# Altium PCB Robotronik-carto.PcbDoc
Units mil, origin at the board's own origin, x right, y up, seen from the top; angles counter-clockwise.
Board outline 2370 x 1320 mil, 2 copper layers (Top Layer, Bottom Layer); 15 components, 12 nets, 59 pads, 0 vias.
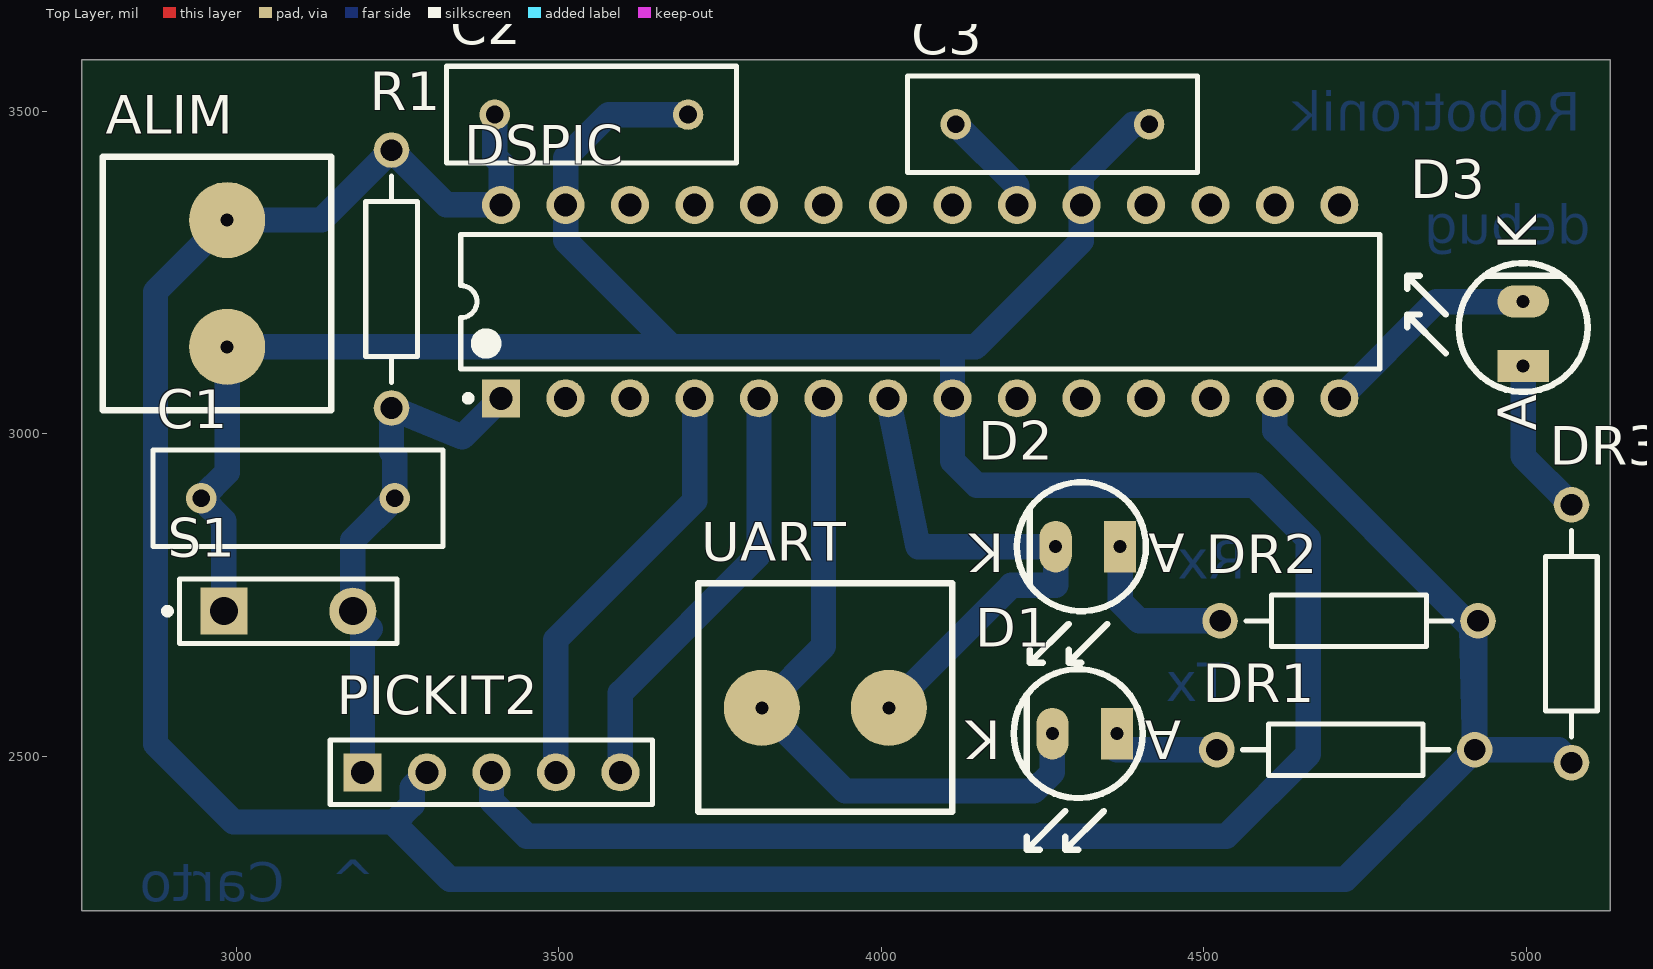
[diagram p0: Top Layer view]
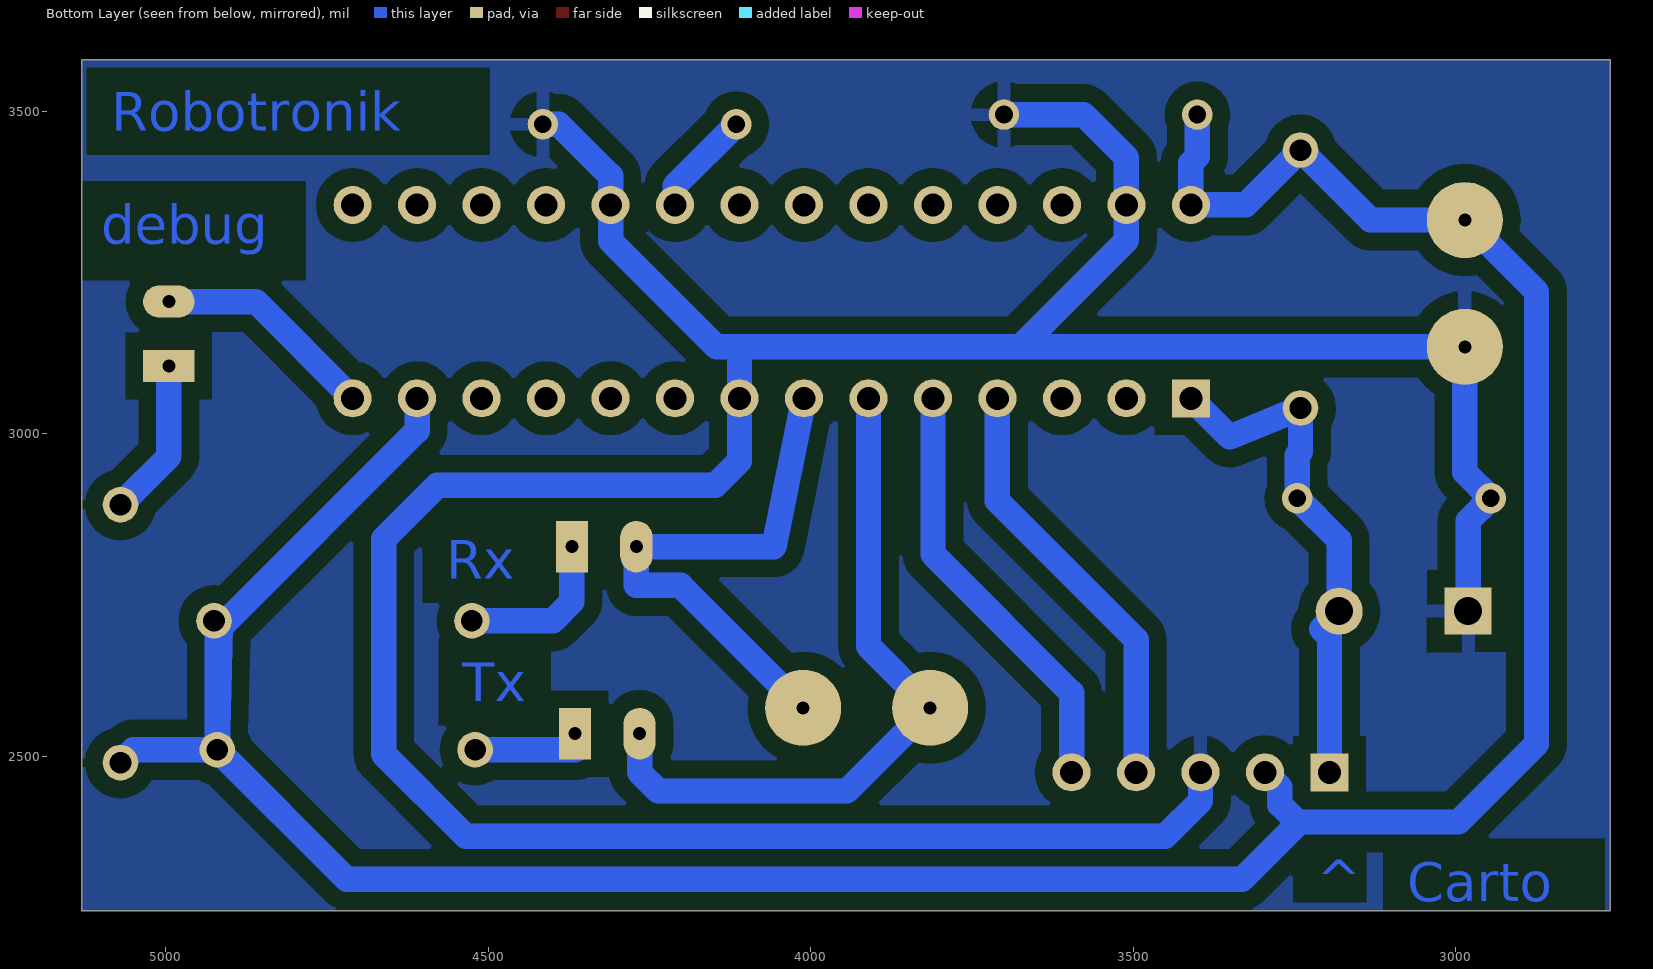
[diagram p1: Bottom Layer view, seen from below]

## Layer stack, top to bottom
Top Layer: signal copper 1.4
Dielectric: dielectric 12.6, FR-4, Dk 4.8
Bottom Layer: signal copper 1.4

## Board outline
2760.28,3580 2760.28,2260 5130.28,2260 5130.28,3580

## Design rules (kind name [scope] priority, off if disabled: settings)
Clearance [All] p1: gap=27.56
PolygonConnect [All] p1: connectstyle=Relief reliefconductorwidth=20 reliefentries=4 polygonreliefangle="90 Angle"
RoutingLayers [All] p1: top layer_v5=FALSE bottom layer_v5=TRUE
RoutingVias [All] p1: holewidth=20 width=60 viastyle="Through Hole" minholewidth=20 minwidth=60 maxholewidth=20 maxwidth=60
SilkscreenOverComponentPads [All] p1: minsilkscreentomaskgap=10
SolderMaskExpansion [All] p1: expansion=4
Width [All] p1: maxlimit=39.37 minlimit=20 preferedwidth=39.37
26 further rules are at their usual default settings.

## Components (designator, comment, footprint, x,y, rotation, side; value= is the part's Value field where it differs from the comment)
ALIM "Bornier_2" Bornier_2 2985.28,3430 r270 top
C1 "Cap" RAD-0.3 3095.28,2900 r0 top
C2 "Cap" RAD-0.3 3550.28,3495 r180 top
C3 "Cap" RAD-0.3 4265.28,3480 r180 top
D1 "Led Verte" LED 4365.28,2535 r180 top
D2 "Led Orange" LED 4370.28,2825 r180 top
D3 "Led Rouge" LED 4995.28,3105 r90 top
DR1 "Res2" AXIAL-0.4 4720.28,2510 r0 top
DR2 "Res2" AXIAL-0.4 4725.28,2710 r0 top
DR3 "Res2" AXIAL-0.4 5070.28,2690 r270 top
DSPIC "DSPIC33FJ128MC802-I/SP" SPDIP300-SP28 4060.28,3205 r90 top
PICKIT2 "Header 5H" HDR1X5 3195.28,2475 r0 top
R1 "Res2" AXIAL-0.4 3240.28,3240 r90 top
S1 "SW-SPST" SPST-2 3080.28,2725 r0 top
UART "UART" Bornier_2 4110,2575 r180 top

## Footprints (in the part's own frame and the unit in brackets; to place one, negate y for a bottom-side part, rotate by r counter-clockwise, add the part's x,y. Pads: shape width x height; smd on the part's side, far side on the other; paste and mask are expansions set on the pad)
AXIAL-0.4 [mm] "Axial Device, Thru-Hole; 2 Leads; 0.4 in Pin Spacing"
  round 1.4 hole 0.85: 1(-5.08,0) 2(5.08,0)
  silkscreen extent -4.06,-1.02 4.06,1.02
Bornier_2 [mm]
  round 3 hole 0.508: 1(2.5,0) 2(7.5,0)
  silkscreen extent 0,-4.9 10,4.1
HDR1X5 [mm] "Connector; Header; 5 Position"
  rect 1.5x1.5 hole 0.9: 1(0,0)
  round 1.5 hole 0.9: 2(2.54,0) 3(5.08,0) 4(7.62,0) 5(10.16,0)
  silkscreen extent -1.27,-1.27 11.43,1.27
LED [mil]
  rect 50x80 hole 20: 1(0,0)
  oval 50x80 hole 20: 2(100,0)
  silkscreen extent -40,-100 160,180
RAD-0.3 [mm] "Radial Cap, Thru-Hole; 2 Leads; 0.3 in Pin Spacing"
  round 1.2 hole 0.7: 1(-3.81,0) 2(3.81,0)
  silkscreen extent -5.71,-1.91 5.71,1.91
SPDIP300-SP28 [mm] "DIP, 28-Leads, Row Spacing 7.62mm, Pitch 2.54mm, Body 34.9x6.8mm"
  rect 1.5x1.5 hole 0.9: 1(-3.81,16.51)
  round 1.5 hole 0.9: 2(-3.81,13.97) 3(-3.81,11.43) 4(-3.81,8.89) 5(-3.81,6.35) 6(-3.81,3.81) 7(-3.81,1.27) 8(-3.81,-1.27) 9(-3.81,-3.81) 10(-3.81,-6.35) 11(-3.81,-8.89) 12(-3.81,-11.43) 13(-3.81,-13.97) 14(-3.81,-16.51) 15(3.81,-16.51) 16(3.81,-13.97) 17(3.81,-11.43) 18(3.81,-8.89) 19(3.81,-6.35) 20(3.81,-3.81) 21(3.81,-1.27) 22(3.81,1.27) 23(3.81,3.81) 24(3.81,6.35) 25(3.81,8.89) 26(3.81,11.43) 27(3.81,13.97) 28(3.81,16.51)
  silkscreen extent -3.93,-18.1 2.65,18.1, body extent -3.55,-18.1 3.55,18.1, height 5.08
SPST-2 [mm] "Switch; 2 Leads"
  rect 1.85x1.85 hole 1.1: 1(-2.54,0)
  round 1.85 hole 1.1: 2(2.54,0)
  silkscreen extent -4.89,-1.27 4.28,1.27

## Part data
ALIM: "Header, 2-Pin"
C1 C2 C3: "Capacitor"
D1 D2 D3: library part Led, "LED"
DR1 DR2 DR3 R1: "Resistor"
DSPIC: "High-Performance 16-bit Digital Signal Controller, 128 KB Flash, 16 KB RAM, 28-Pin SPDIP, Industrial Temperature"
PICKIT2: "Header, 5-Pin, Right Angle"
S1: "Single-Pole, Single-Throw Switch"
UART: library part Bornier_2, "Header, 2-Pin"

## Nets (pads, with @x,y where several pads share a name; then routed paths per layer and width w, separated by ;. In a path a pad name is that pad's centre, name@x,y a point inside that pad or via, vN(x,y) a via of type N, cw(c..) or ccw(c..) an arc to the next point about the centre after c; other vN are vias at no path point)
DEBUG: D3.2 DSPIC.14 | length 347.1
  Bottom Layer w39.37: DSPIC.14 4860.28,3205 D3.2
GND: ALIM.2 C1.1 C2.1 C3.1 DSPIC.8 DSPIC.19 DSPIC.27 PICKIT2.3 S1.1 | length 5151.6
  Bottom Layer w39.37: S1.1 2980.28,2865 C1.1 2985.28,2940 ALIM.2 3675.55,3134.72 ; PICKIT2.3 3395.28,2430.72 3450,2376 4535,2376 4662,2503 4662,2837 4579,2920 4148,2920 4110.28,2957.72 DSPIC.8 4110.28,3134.72 ; C2.1 3577,3495 3510.28,3428.28 DSPIC.27 3510.28,3300 3675.55,3134.72 ; C3.1 4390.28,3480 4310.28,3400 DSPIC.19 4310.28,3299 4146,3134.72 4110.28,3134.72 ; 3675.55,3134.72 4110.28,3134.72
NetC1_2: C1.2 DSPIC.1 PICKIT2.1 R1.1 S1.2 | length 814.3
  Bottom Layer w39.37: PICKIT2.1 3195.28,2685 3207.78,2697.5 S1.2 3180.28,2835 C1.2 3245.28,2967 3240.28,2972 R1.1 3350.28,2995 DSPIC.1
NetC3_2: C3.2 DSPIC.20 | length 164.4
  Bottom Layer w39.37: C3.2 4210.28,3385 DSPIC.20
NetD1_1: D1.1 DR1.1 | length 180
  Bottom Layer w39.37: D1.1 4365.28,2510 DR1.1
NetD2_1: D2.1 DR2.1 | length 252.6
  Bottom Layer w39.37: D2.1 4370.28,2739.72 4400,2710 DR2.1
NetD3_1: D3.1 DR3.1 | length 246.1
  Bottom Layer w39.37: D3.1 4995.28,2965 DR3.1
PGC: DSPIC.5 PICKIT2.5 | length 669.1
  Bottom Layer w39.37: PICKIT2.5 3595.28,2598.28 3810.28,2813.28 DSPIC.5
PGD: DSPIC.4 PICKIT2.4 | length 669.1
  Bottom Layer w39.37: PICKIT2.4 3495.28,2680.75 3710.28,2895.75 DSPIC.4
UART_RX: D2.2 DSPIC.7 UART.1 | length 845.5
  Bottom Layer w39.37: DSPIC.7 4056.83,2825 D2.2 4270.28,2765 4201.57,2765 UART.1
UART_TX: D1.2 DSPIC.6 UART.2 | length 1095.6
  Bottom Layer w39.37: DSPIC.6 3910.28,2670.55 UART.2 3943.72,2446 4236.28,2446 4265.28,2475 D1.2
VDD: ALIM.1 C2.2 DR1.2 DR2.2 DR3.2 DSPIC.13 DSPIC.28 PICKIT2.2 R1.2 | length 4856.7
  Bottom Layer w39.37: 3245,2395 3331,2309 4719.28,2309 DR1.2 ; PICKIT2.2 3272.28,2452 3272.28,2425 3245.28,2398 2995.28,2398 2874.28,2519 2874.28,3220.57 ALIM.1 3131.85,3331.57 R1.2 3325.28,3355 DSPIC.28 3410.28,3420 3400.28,3430 C2.2 ; DSPIC.13 4610.28,3005 DR2.2@4915.28,2700 ; DR2.2 DR2.2@4915.28,2700 ; DR3.2 5050.28,2510 DR1.2 ; DR2.2@4915.28,2700 4920.28,2695 DR1.2 ; DR2.2@4915.28,2700 DR1.2
pads on no net: DSPIC.2 DSPIC.3 DSPIC.9 DSPIC.10 DSPIC.11 DSPIC.12 DSPIC.15 DSPIC.16 DSPIC.17 DSPIC.18 DSPIC.21 DSPIC.22 DSPIC.23 DSPIC.24 DSPIC.25 DSPIC.26

## Polygon pours and split planes (outlines as drawn)
GND on Bottom Layer "Bottom Layer-No Net" (solid, pour order 6): 2760,3580 5130,3580 5130,2260 2760,2260

## Other copper
Bottom Layer:
  text "Robotronik" at 5085,3470 h60
  text "debug" at 5100,3295 h60
  text "Rx" at 4565,2775 h60
  text "Tx" at 4540,2585 h60
  text "^" at 3215,2280 h60
  text "Carto" at 3075,2275 h60

## Text inside footprints (layer, text, board x,y; h text height)
D1: Top Overlay "K" at 4185.28,2555 h60 r180; Top Overlay "A" at 4465.28,2555 h60 r180
D2: Top Overlay "K" at 4190.28,2845 h60 r180; Top Overlay "A" at 4470.28,2845 h60 r180
D3: Top Overlay "K" at 5015.28,3285 h60 r90; Top Overlay "A" at 5015.28,3005 h60 r90